# Altium PCB PCB2.PcbDoc
Units mm, origin at the board's own origin, x right, y up, seen from the top; angles counter-clockwise.
Board outline 133.86 x 49.4 mm, 2 copper layers (Top Layer, Bottom Layer); 25 components, 28 nets, 127 pads, 1 vias.
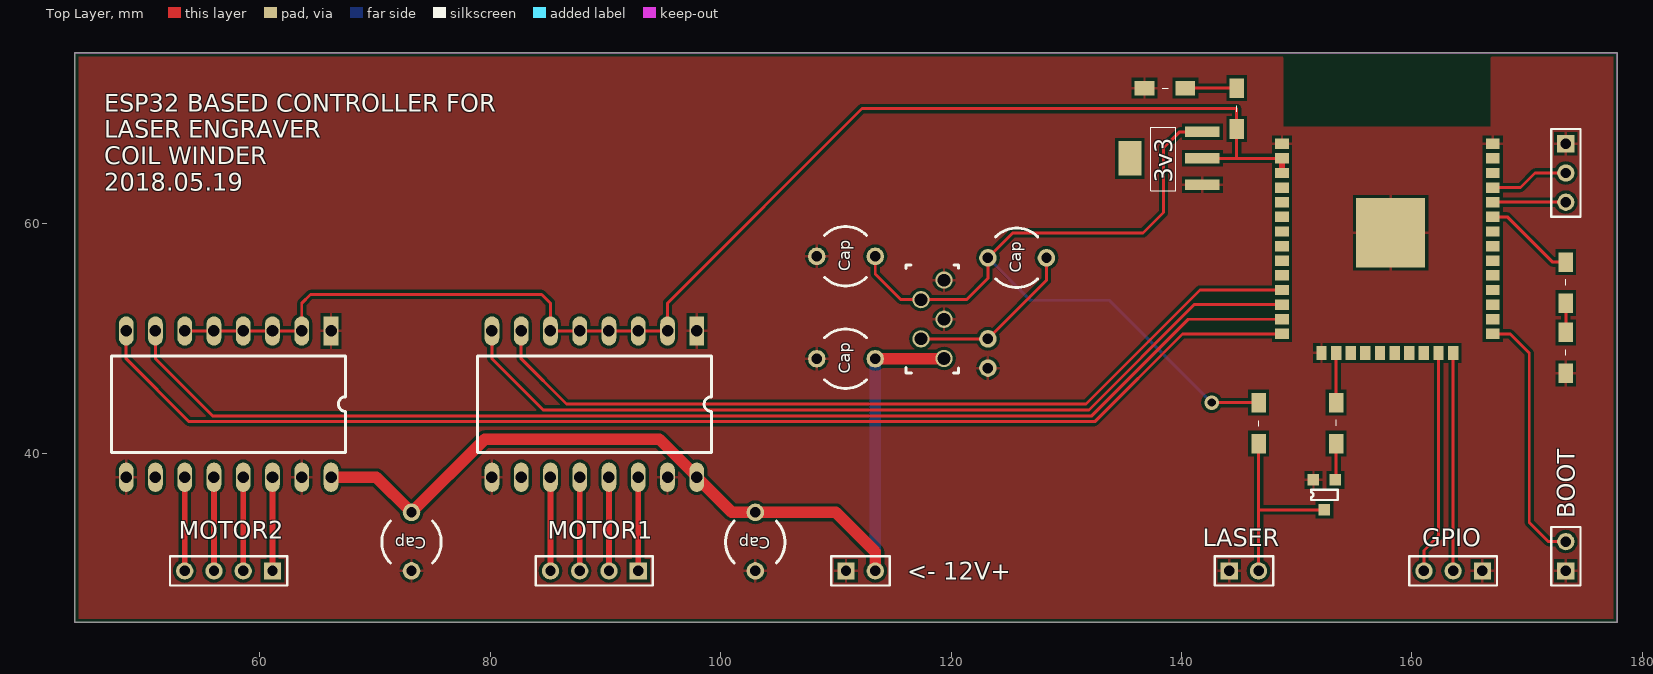
[diagram p0: Top Layer view]
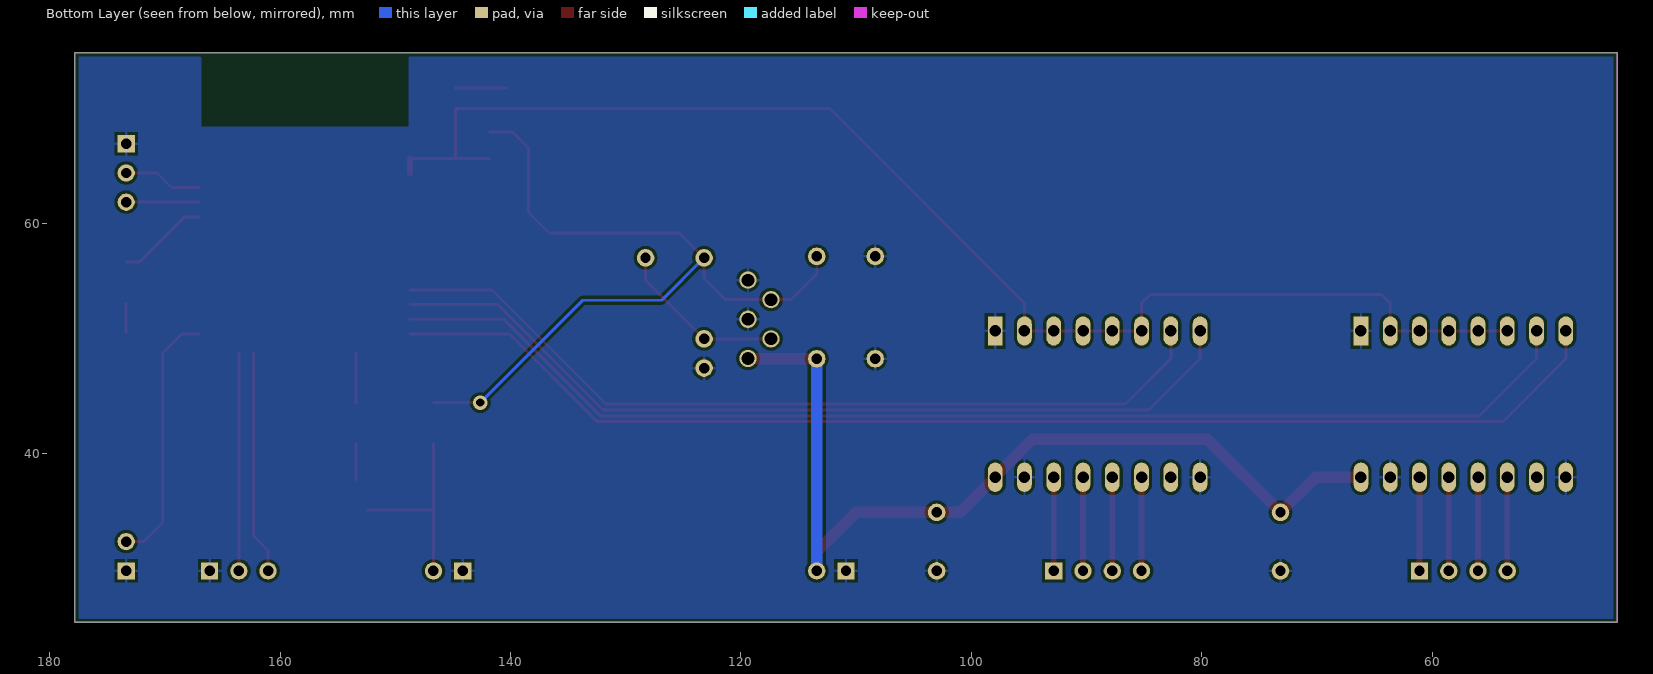
[diagram p1: Bottom Layer view, seen from below]

## Layer stack, top to bottom
Top Solder: solder mask 0.0102, Solder Resist, Dk 3.5
Top Layer: signal copper 0.0356
Dielectric 1: dielectric 0.32, FR-4, Dk 4.8
Bottom Layer: signal copper 0.0356
Bottom Solder: solder mask 0.0102, Solder Resist, Dk 3.5

## Board outline
177.8,25.4 177.8,74.803 43.942,74.803 43.942,25.4 177.8,25.4

## Design rules (kind name [scope] priority, off if disabled: settings)
Clearance [All] p1: gap=0.254
PolygonConnect [All] p1: connectstyle=Relief reliefconductorwidth=0.254 reliefentries=4 polygonreliefangle="90 Angle" airgapwidth=0.254
RoomDefinition Sheet2 [InComponentClass('Sheet2')] p1: confinementstyle=ConfineIn formatcopy=TRUE lockcomponents=FALSE outline 0,0 50.8,0 50.8,25.4 0,25.4
RoutingVias [All] p1: holewidth=0.711 width=1.27 viastyle="Through Hole" minholewidth=0.711 minwidth=1.27 maxholewidth=0.711 maxwidth=1.27
SolderMaskExpansion [All] p1: expansion=0.102
Width [All] p1: maxlimit=0.254 minlimit=0.254 preferedwidth=0.254
30 further rules are at their usual default settings.

## Classes and differential pairs
component class Sheet2: ""

## Components (designator, comment, footprint, x,y, rotation, side; value= is the part's Value field where it differs from the comment)
1 "SOT223" SOT223 141.809,63.359 r180 top
2 "1206" 1206 153.416,44.444 r270 top
3 "1206" 1206 146.685,40.9 r90 top
4 "1206" 1206 144.78,68.205 r90 top
5 "1206" 1206 140.335,71.755 r180 top
6 "1206" 1206 173.355,56.642 r270 top
7 "1206" 1206 173.355,50.546 r270 top
*1 "DRV8825_Carrier" "DRV8825 CARRIER" 66.167,50.673 r270 top
*2 "DRV8825_Carrier" "DRV8825 CARRIER" 97.917,50.673 r270 top
*3 "SOT23-3" SOT23-3 152.4,36.449 r0 top
C1 "Capacitor 200 mil" "circular 200 mil" 73.152,29.845 r90 top
C2 "Capacitor 200 mil" "circular 200 mil" 102.997,29.845 r90 top
C3 "Capacitor 200 mil" "circular 200 mil" 108.331,48.26 r0 top
C4 "Capacitor 200 mil" "circular 200 mil" 123.19,57.023 r0 top
C5 "Capacitor 200 mil" "circular 200 mil" 108.331,57.15 r0 top
LM1 "LM" "TO 22Ö" 119.38,48.289 r90 top
M1 "ESP32S_Module" ESP32S_W 148.846,48.895 r0 top
P1 "Header 3" HDR1X3 173.355,66.929 r270 top
P2 "Header 2" HDR1X2 173.355,29.845 r90 top
P3 "Header 2" HDR1X2 110.871,29.845 r0 top
P4 "Header 4" HDR1X4 61.087,29.845 r180 top
P5 "Header 4" HDR1X4 92.837,29.845 r180 top
P6 "Header 2" HDR1X2 144.145,29.845 r0 top
P7 "Header 3" HDR1X3 166.116,29.845 r180 top
R1 "RES" "LINEAR 100 MIL" 123.19,47.449 r90 top

## Footprints (in the part's own frame and the unit in brackets; to place one, negate y for a bottom-side part, rotate by r counter-clockwise, add the part's x,y. Pads: shape width x height; smd on the part's side, far side on the other; paste and mask are expansions set on the pad)
1206 [mm]
  rect 1.7x1.25 smd: 1(0,0) 2(3.55,0)
  silkscreen extent 1.5,0 2,0
"circular 200 mil" [mil]
  round 60 hole 35.43: 1(0,0) 2(200,0)
  silkscreen extent 27,-101 170,101
"DRV8825 CARRIER" [mm]
  rect 2.54x1.27 hole 1: 1(0,0)
  oval 2.54x1.27 hole 1: 2(0,-2.54) 3(0,-5.08) 4(0,-7.62) 5(0,-10.16) 6(0,-12.7) 7(0,-15.24) 8(0,-17.78) 9(12.7,-17.78) 10(12.7,-15.24) 11(12.7,-12.7) 12(12.7,-10.16) 13(12.7,-7.62) 14(12.7,-5.08) 15(12.7,-2.54) 16(12.7,0)
  silkscreen extent 2.16,-19.05 10.54,1.27
ESP32S_W [mm] "Esp32S Module wide for hand soldering"
  rect 1.2x0.9 smd: 1(-0.127,18.034) 2(-0.127,16.764) 3(-0.127,15.494) 4(-0.127,14.224) 5(-0.127,12.954) 6(-0.127,11.684) 7(-0.127,10.414) 8(-0.127,9.144) 9(-0.127,7.874) 10(-0.127,6.604) 11(-0.127,5.334) 12(-0.127,4.064) 13(-0.127,2.794) 14(-0.127,1.524) 25(18.161,1.524) 26(18.161,2.794) 27(18.161,4.064) 28(18.161,5.334) 29(18.161,6.604) 30(18.161,7.874) 31(18.161,9.144) 32(18.161,10.414) 33(18.161,11.684) 34(18.161,12.954) 35(18.161,14.224) 36(18.161,15.494) 37(18.161,16.764) 38(18.161,18.034)
  rect 0.9x1.2 smd: 15(3.302,-0.127) 16(4.57,-0.127) 17(5.84,-0.127) 18(7.11,-0.127) 19(8.38,-0.127) 20(9.65,-0.127) 21(10.92,-0.127) 22(12.19,-0.127) 23(13.46,-0.127) 24(14.73,-0.127)
  rect 6x6 smd: 101(9.3,10.3)
  Top Layer pour cut-out: 0,25.5 9,25.5 18,25.5 18,19.5 0,19.5
  Bottom Layer pour cut-out: 0,25.5 18,25.5 18,19.5 0,19.5
  body extent 0,0 18.03,25.53, height 2
HDR1X2 [mm] "Connector; Header; 2 Position"
  rect 1.5x1.5 hole 0.9: 1(0,0)
  round 1.5 hole 0.9: 2(2.54,0)
  silkscreen extent -1.27,-1.27 3.81,1.27
HDR1X3 [mm] "Connector; Header; 3 Position"
  rect 1.5x1.5 hole 0.9: 1(0,0)
  round 1.5 hole 0.9: 2(2.54,0) 3(5.08,0)
  silkscreen extent -1.27,-1.27 6.35,1.27
HDR1X4 [mm] "Connector; Header; 4 Position"
  rect 1.5x1.5 hole 0.9: 1(0,0)
  round 1.5 hole 0.9: 2(2.54,0) 3(5.08,0) 4(7.62,0)
  silkscreen extent -1.27,-1.27 8.89,1.27
"LINEAR 100 MIL" [mil]
  round 60 hole 35.43: 1(0,0) 2(100,0)
SOT23-3 [mm] "SOT23-3"
  rect 1x1 smd: 1(0.95,1.3) 2(-0.95,1.3) 3(0,-1.3)
  silkscreen extent -1.15,-0.45 1.15,0.45, body extent -1.45,-1.4 1.45,1.4, height 1.3
SOT223 [mm]
  rect 3x0.9 smd: 1(0,0) 2(0,-2.3) 3(0,-4.6)
  rect 2x3 smd: 4(6.3,-2.3)
  silkscreen extent 2.3,-5 4.5,0.5
"TO 22Ö" [mm]
  round 1.5 hole 1.1: 1(0,0) 2(1.7,2) 3(3.4,0) 4(5.1,2) 5(6.8,0)
  silkscreen extent -1.27,-1.27 8.13,3.3

## Part data
1: "3v3 regulator"
*1 *2: "Carrier PCB for DRV8825"
C1 C2 C3 C4 C5: library part CAP, "Capacitor 200 mil pin distance"
M1: "Esp-32S"
P1 P7: "Header, 3-Pin"
P2 P3 P6: "Header, 2-Pin"
P4 P5: "Header, 4-Pin"

## Via types
v1: diameter 1.27, hole 0.711, Top Layer to Bottom Layer, 1 vias

## Nets (pads, with @x,y where several pads share a name; then routed paths per layer and width w, separated by ;. In a path a pad name is that pad's centre, name@x,y a point inside that pad or via, vN(x,y) a via of type N, cw(c..) or ccw(c..) an arc to the next point about the centre after c; other vN are vias at no path point)
3V3: 1.2 4.1 *1.2 *1.3 *1.4 *1.5 *1.6 *2.2 *2.3 *2.4 *2.5 *2.6 M1.2 M1.3 | length 118.7
  Top Layer w0.254: *1.6 *1.5 *1.4 *1.3 *1.2 63.627,53.086 64.389,53.848 84.455,53.848 85.217,53.086 *2.6 *2.5 *2.4 *2.3 *2.2 95.377,53.086 112.268,69.977 144.78,69.977 4.1 144.78,65.659 ; 1.2 144.78,65.659 ; M1.2 144.78,65.659
  Top Layer w0.5: M1.3 M1.2
5V: 1.3 3.2 C4.1 C5.2 LM1.4 | length 69.9
  Top Layer w0.254: C5.2 113.411,55.626 115.648,53.389 LM1.4 121.334,53.389 123.19,55.245 C4.1 125.349,59.182 136.652,59.182 138.43,60.96 138.43,66.548 139.841,67.959 1.3 ; v1(142.621,44.45) 3.2
  Bottom Layer w0.254: C4.1 126.873,53.34 133.731,53.34 v1(142.621,44.45)
12V: *1.16 *2.16 C1.2 C2.2 C3.2 LM1.1 P3.2 | length 81.3
  Top Layer w0.254: LM1.1@119.351,48.26 LM1.1
  Top Layer w1: *1.16 70.104,37.973 C1.2 79.502,41.275 94.674,41.275 97.917,38.032 *2.16 100.965,34.925 C2.2 109.982,34.925 113.411,31.496 P3.2 ; C3.2 LM1.1@119.351,48.26
  Bottom Layer w1: P3.2 C3.2
BOOT: M1.25 P2.2 | length 22.4
  Top Layer w0.254: M1.25 168.529,50.419 170.18,48.768 170.18,34.036 171.831,32.385 P2.2
DIR1: *2.7 M1.11 | length 74.2
  Top Layer w0.254: *2.7 82.677,48.26 86.614,44.323 131.699,44.323 141.605,54.229 M1.11
DIR2: *1.7 M1.13 | length 105.7
  Top Layer w0.254: *1.7 50.927,48.26 55.88,43.307 132.207,43.307 140.589,51.689 M1.13
GND: 1.1 5.2 7.2 *1.1 *1.9 *1.15 *2.1 *2.9 *2.15 *3.2 C1.1 C2.1 C3.1 C5.1 LM1.3 LM1.5 M1.1 M1.15 M1.38 M1.101 P1.1 P2.1 P3.1 P6.1 P7.1 R1.1
GPIO1: M1.23 P7.3 | length 19.4
  Top Layer w0.254: P7.3 161.036,31.623 162.306,32.893 M1.23
GPIO2: M1.24 P7.2 | length 18.9
  Top Layer w0.254: P7.2 M1.24
LASER: 2.1 M1.16 | length 4.3
  Top Layer w0.254: 2.1 M1.16
LED: 6.1 M1.33 | length 8
  Top Layer w0.254: M1.33 168.275,60.579 172.212,56.642 6.1
Net_1: *2.14 P5.1 | length 8.1
  Top Layer w0.5: P5.1 *2.14
Net_1: *1.14 P4.1 | length 8.1
  Top Layer w0.5: P4.1 *1.14
Net_1: 2.2 *3.1 | length 3.2
  Top Layer w0.254: *3.1 153.416,37.815 2.2
Net_1: 3.1 *3.3 P6.2 | length 16.8
  Top Layer w0.254: P6.2 146.685,35.179 ; 3.1 146.685,35.179 ; *3.3 146.715,35.149 146.685,35.179
Net_1: 4.2 5.1 | length 4.4
  Top Layer w0.254: 5.1 4.2
Net_1: 6.2 7.1 | length 2.5
  Top Layer w0.254: 7.1 6.2
Net_2: C4.2 LM1.2 R1.2 | length 14.9
  Top Layer w0.254: LM1.2 R1.2 128.27,55.069 C4.2
Net_2: *2.13 P5.2 | length 8.1
  Top Layer w0.5: P5.2 *2.13
Net_2: *1.13 P4.2 | length 8.1
  Top Layer w0.5: P4.2 *1.13
Net_3: *2.12 P5.3 | length 8.1
  Top Layer w0.5: P5.3 *2.12
Net_3: *1.12 P4.3 | length 8.1
  Top Layer w0.5: P4.3 *1.12
Net_4: *2.11 P5.4 | length 8.1
  Top Layer w0.5: P5.4 *2.11
Net_4: *1.11 P4.4 | length 8.1
  Top Layer w0.5: P4.4 *1.11
RX: M1.34 P1.3 | length 6.3
  Top Layer w0.254: M1.34 P1.3
STEP1: *2.8 M1.12 | length 76.6
  Top Layer w0.254: *2.8 80.137,48.26 84.582,43.815 131.953,43.815 141.097,52.959 M1.12
STEP2: *1.8 M1.14 | length 108.2
  Top Layer w0.254: *1.8 48.387,48.26 53.848,42.799 132.461,42.799 140.081,50.419 M1.14
TX: M1.35 P1.2 | length 6.9
  Top Layer w0.254: M1.35 169.418,63.119 170.688,64.389 P1.2
pads on no net: 1.4 *1.10 *2.10 M1.4 M1.5 M1.6 M1.7 M1.8 M1.9 M1.10 M1.17 M1.18 M1.19 M1.20 M1.21 M1.22 M1.26 M1.27 M1.28 M1.29 M1.30 M1.31 M1.32 M1.36 M1.37

## Polygon pours and split planes (outlines as drawn)
GND on Top Layer "Bottom Layer-No Net" (solid, remove dead copper, pour order 4): 43.942,74.803 177.8,74.803 177.8,25.4 43.942,25.4
GND on Bottom Layer "Bottom Layer-No Net" (solid, remove dead copper, pour order 6): 43.942,74.803 177.8,74.803 177.8,25.4 43.942,25.4

## Keep-outs
Keep-Out Layer:
  the board outline again, w0.1

## Silkscreen, mask and mechanical layers (free items; w line width, h text height)
Top Overlay:
  text "ESP32 BASED CONTROLLER FOR / LASER ENGRAVER / COIL WINDER / 2018.05.19" at 46.482,62.865 h1.52
  text "BOOT" at 174.117,34.417 h1.52 r90
  text "MOTOR2" at 52.959,32.639 h1.52
  text "MOTOR1" at 84.963,32.639 h1.52
  text "LASER" at 141.859,32.004 h1.52
  text "GPIO" at 160.909,32.004 h1.52
  text "<- 12V+" at 116.205,29.083 h1.52

## Text inside footprints (layer, text, board x,y; h text height)
1: Top Overlay "3v3" at 139.209,63.559 h1.52 r90
C1: Top Overlay "Cap" at 74.452,32.745 h1 r180
C2: Top Overlay "Cap" at 104.297,32.745 h1 r180
C3: Top Overlay "Cap" at 111.231,46.96 h1 r90
C4: Top Overlay "Cap" at 126.09,55.723 h1 r90
C5: Top Overlay "Cap" at 111.231,55.85 h1 r90